# Altium PCB cando_pro_set.PcbDoc (part 1 of 3)
Units mm, origin at the board's own origin, x right, y up, seen from the top; angles counter-clockwise.
Board outline 91.6 x 86.4 mm, 2 copper layers (Top Layer, Bottom Layer); 320 components, 25 nets, 1260 pads, 588 vias.
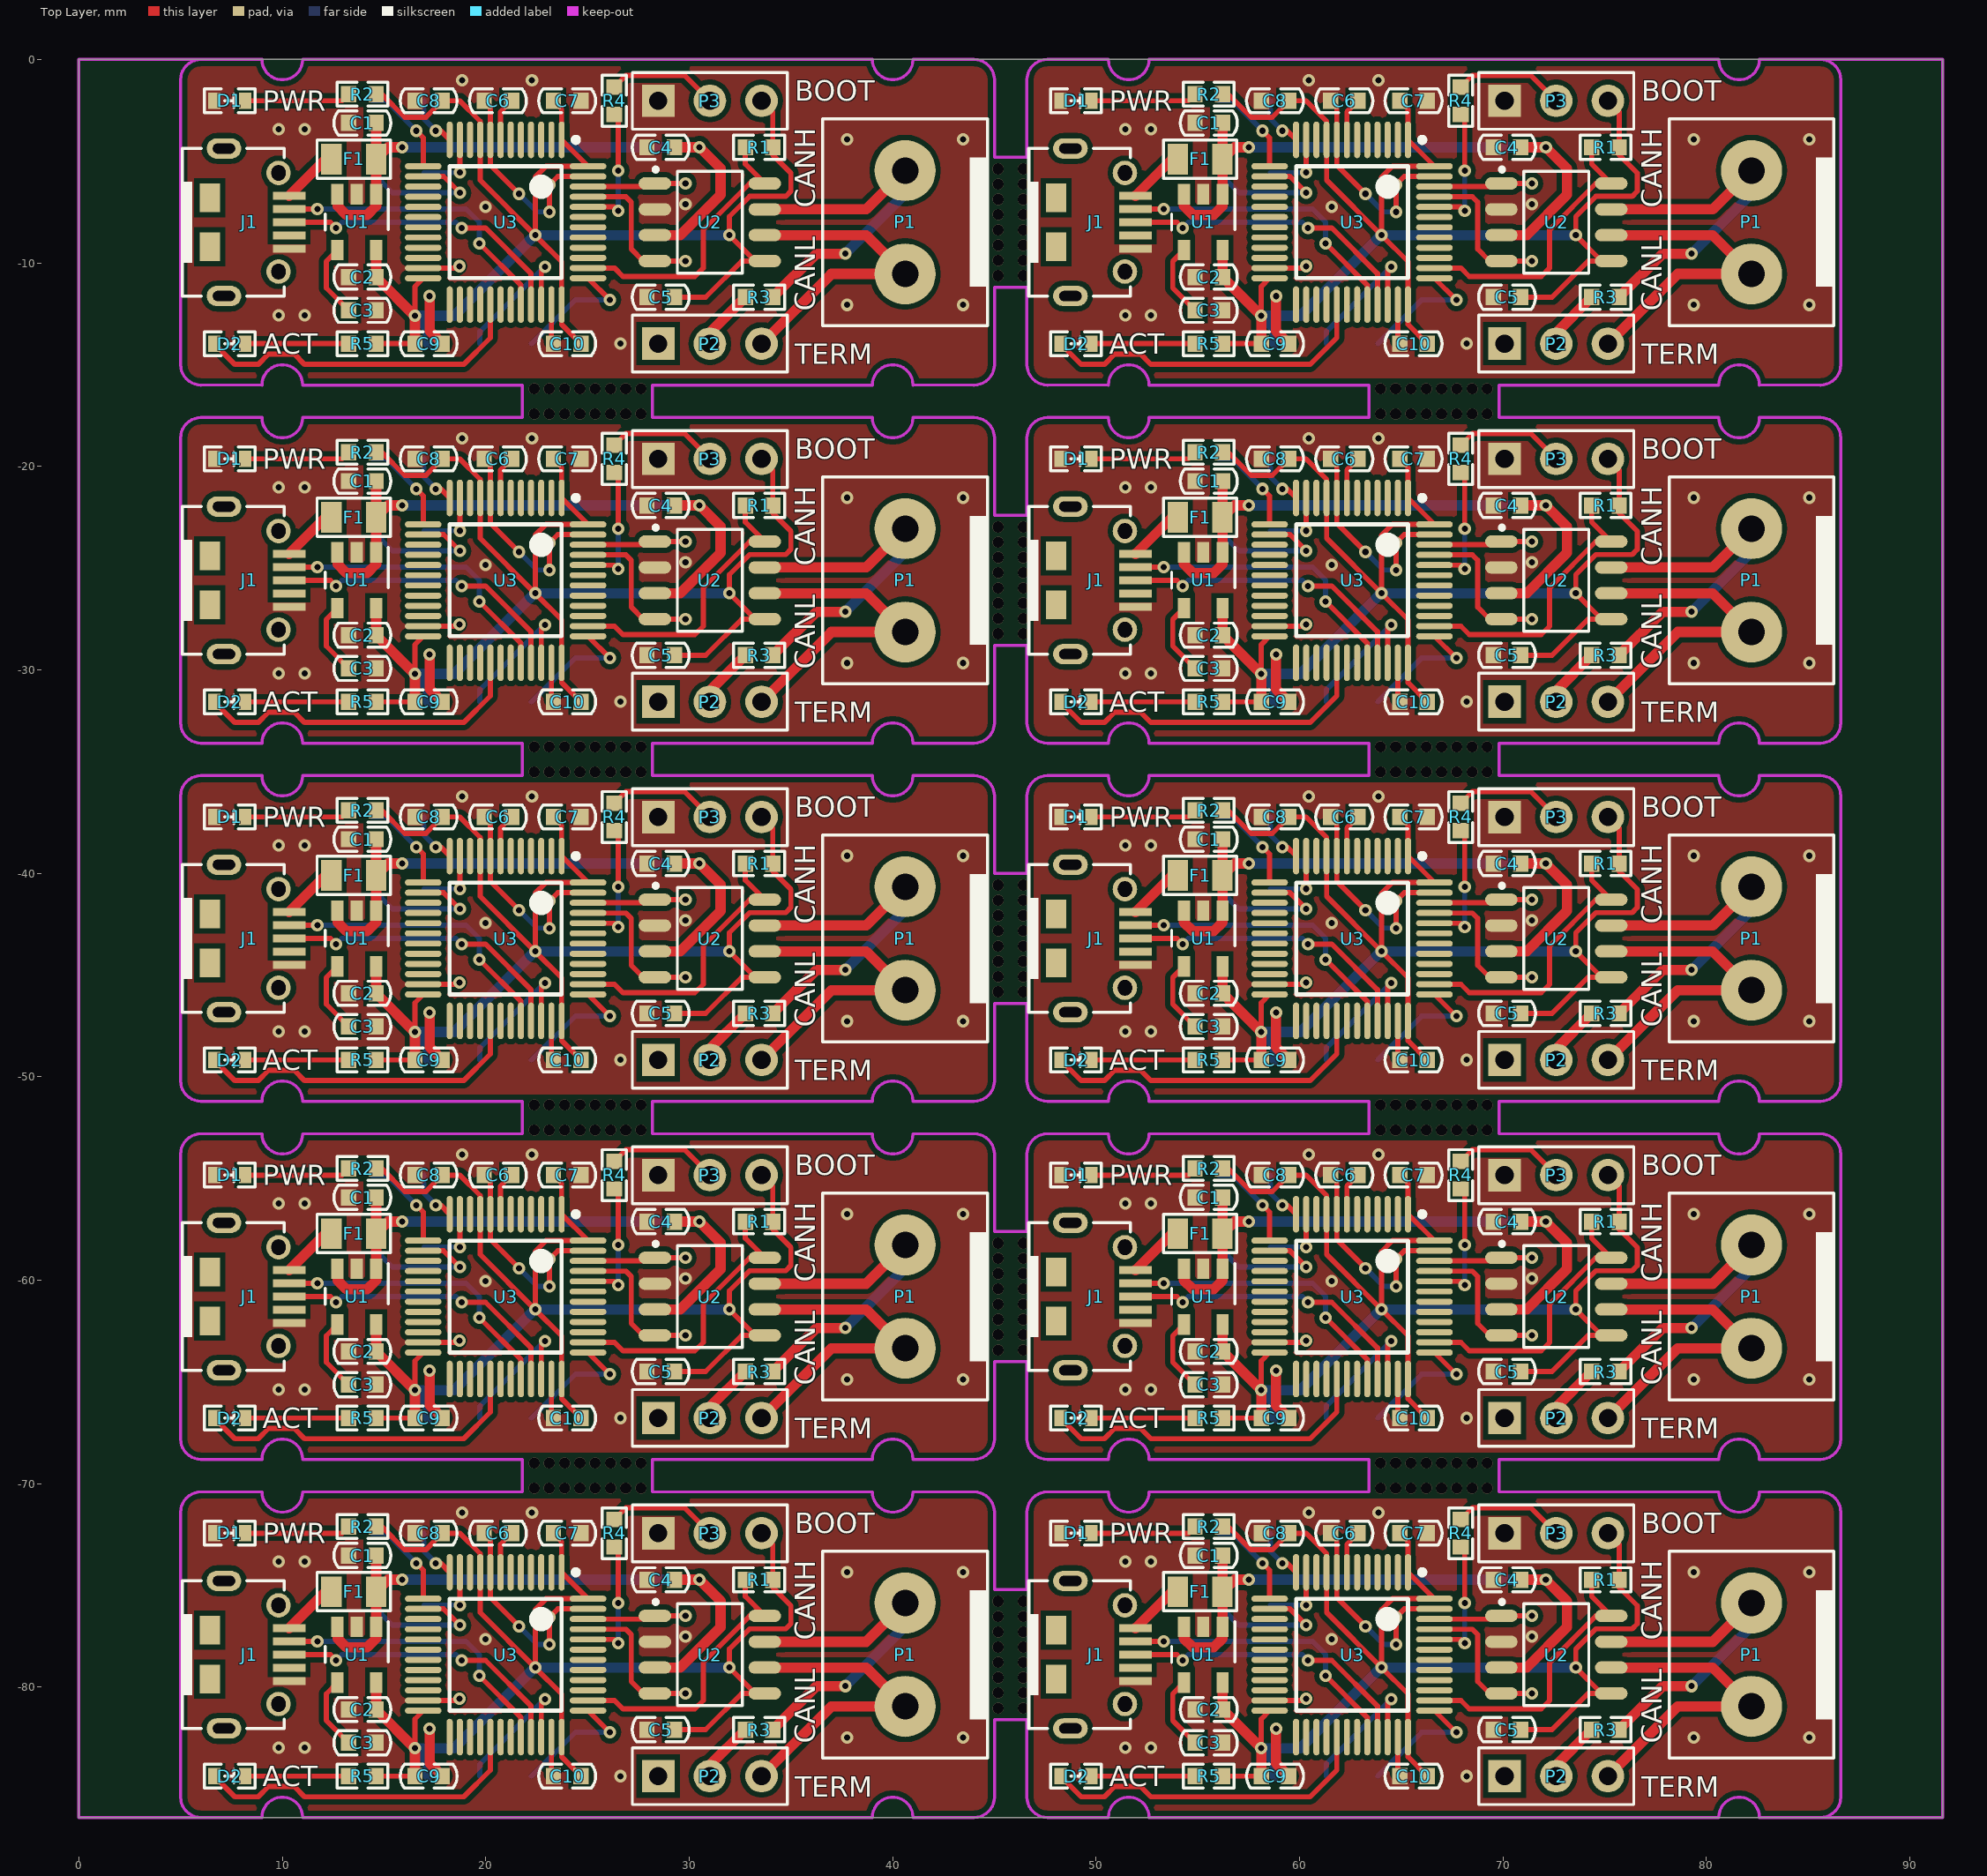
[diagram p0: Top Layer view]
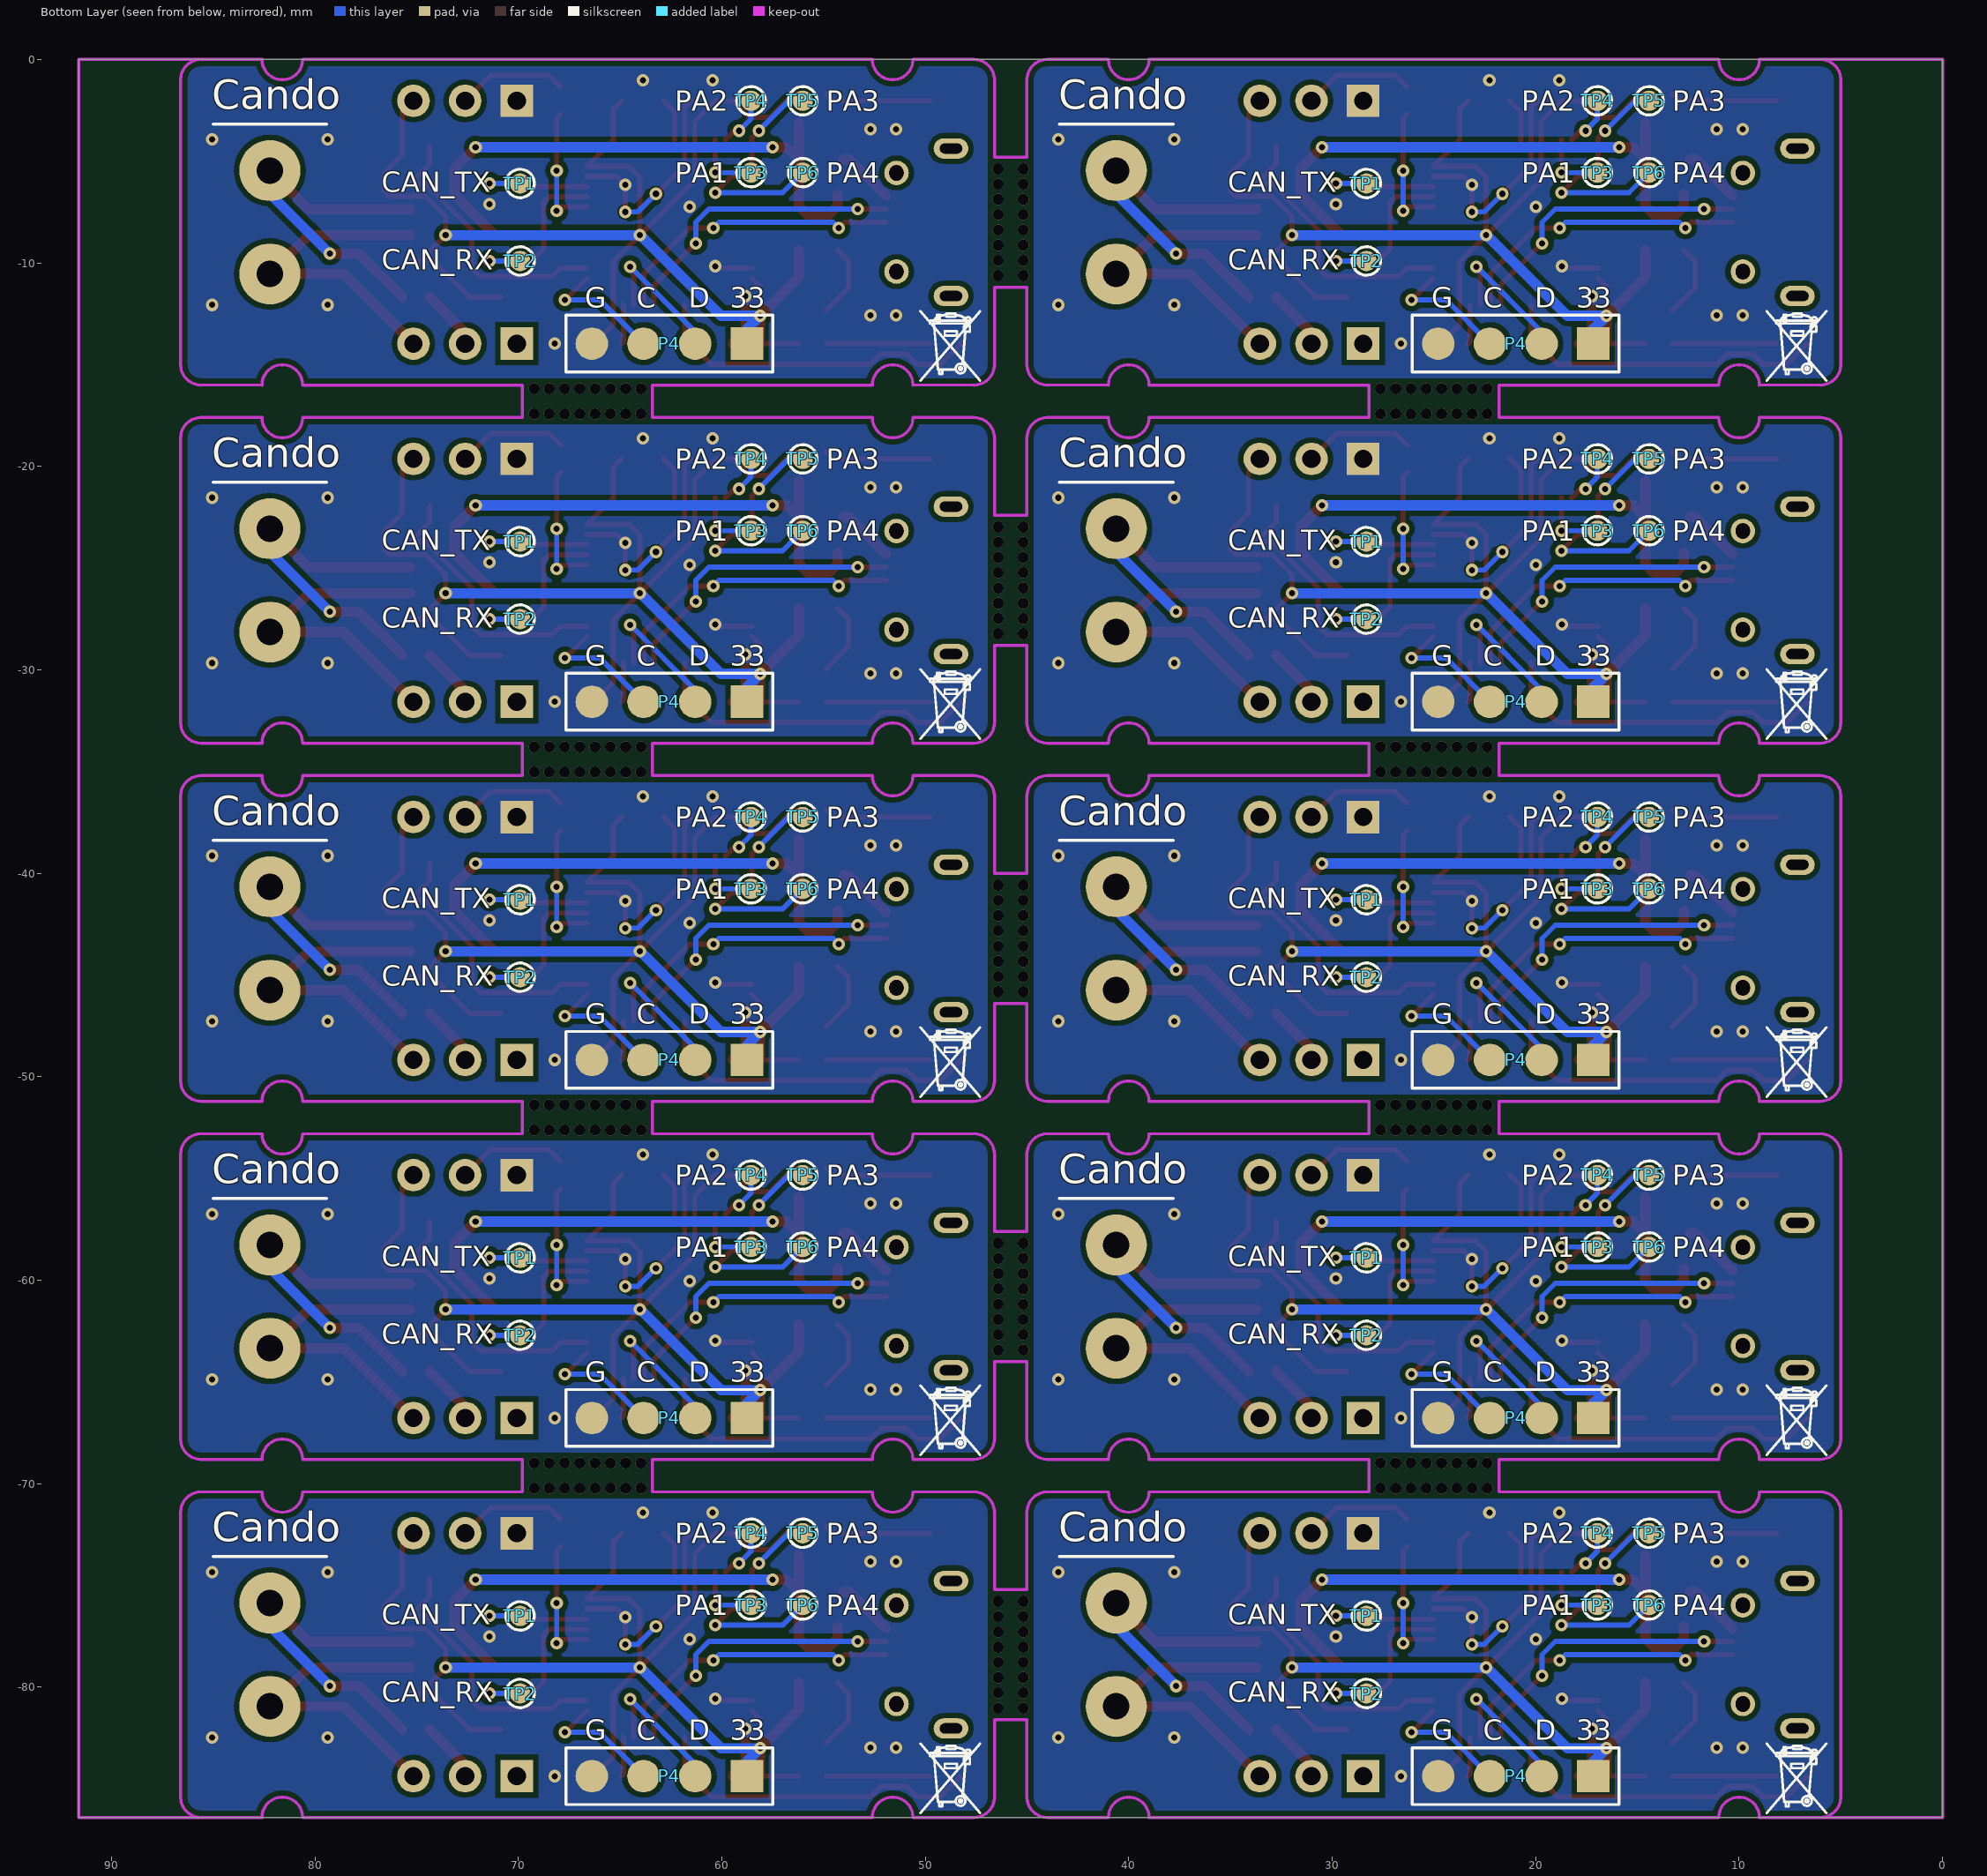
[diagram p1: Bottom Layer view, seen from below]

## Layer stack, top to bottom
Top Solder: solder mask 0.0102, Solder Resist, Dk 3.5
Top Layer: signal copper 0.0356
Dielectric 1: dielectric 0.32, FR-4, Dk 4.8
Bottom Layer: signal copper 0.0356
Bottom Solder: solder mask 0.0102, Solder Resist, Dk 3.5

## Board outline
0,-86.4 0,0 91.6,0 91.6,-86.4

## Design rules (kind name [scope] priority, off if disabled: settings)
Clearance [All] p1: gap=0.254
PolygonConnect [All] p1: connectstyle=Relief reliefconductorwidth=0.254 reliefentries=4 polygonreliefangle="90 Angle" airgapwidth=0.254
RoutingVias [All] p1: holewidth=0.711 width=1.27 viastyle="Through Hole" minholewidth=0.711 minwidth=1.27 maxholewidth=0.711 maxwidth=1.27
SolderMaskExpansion [All] p1: expansion=0.102
Width [All] p1: maxlimit=0.254 minlimit=0.254 preferedwidth=0.254
30 further rules are at their usual default settings.

## Components (designator, comment, footprint, x,y, rotation, side; value= is the part's Value field where it differs from the comment)
C1 "4.7uF" 0603C 13.936,-3.123 r180 top
C1 "4.7uF" 0603C 55.536,-3.123 r180 top
C1 "4.7uF" 0603C 13.936,-20.723 r180 top
C1 "4.7uF" 0603C 55.536,-20.723 r180 top
C1 "4.7uF" 0603C 13.936,-38.323 r180 top
C1 "4.7uF" 0603C 55.536,-38.323 r180 top
C1 "4.7uF" 0603C 13.936,-55.923 r180 top
C1 "4.7uF" 0603C 55.536,-55.923 r180 top
C1 "4.7uF" 0603C 13.936,-73.523 r180 top
C1 "4.7uF" 0603C 55.536,-73.523 r180 top
C2 "4.7uF" 0603C 13.936,-10.692 r180 top
C2 "4.7uF" 0603C 55.536,-10.692 r180 top
C2 "4.7uF" 0603C 13.936,-28.292 r180 top
C2 "4.7uF" 0603C 55.536,-28.292 r180 top
C2 "4.7uF" 0603C 13.936,-45.892 r180 top
C2 "4.7uF" 0603C 55.536,-45.892 r180 top
C2 "4.7uF" 0603C 13.936,-63.492 r180 top
C2 "4.7uF" 0603C 55.536,-63.492 r180 top
C2 "4.7uF" 0603C 13.936,-81.092 r180 top
C2 "4.7uF" 0603C 55.536,-81.092 r180 top
C3 "22nF" 0603C 13.936,-12.331 r0 top
C3 "22nF" 0603C 55.536,-12.331 r0 top
C3 "22nF" 0603C 13.936,-29.931 r0 top
C3 "22nF" 0603C 55.536,-29.931 r0 top
C3 "22nF" 0603C 13.936,-47.531 r0 top
C3 "22nF" 0603C 55.536,-47.531 r0 top
C3 "22nF" 0603C 13.936,-65.131 r0 top
C3 "22nF" 0603C 55.536,-65.131 r0 top
C3 "22nF" 0603C 13.936,-82.731 r0 top
C3 "22nF" 0603C 55.536,-82.731 r0 top
C4 "100nF" 0603C 28.597,-4.317 r180 top
C4 "100nF" 0603C 70.197,-4.317 r180 top
C4 "100nF" 0603C 28.597,-21.917 r180 top
C4 "100nF" 0603C 70.197,-21.917 r180 top
C4 "100nF" 0603C 28.597,-39.517 r180 top
C4 "100nF" 0603C 70.197,-39.517 r180 top
C4 "100nF" 0603C 28.597,-57.117 r180 top
C4 "100nF" 0603C 70.197,-57.117 r180 top
C4 "100nF" 0603C 28.597,-74.717 r180 top
C4 "100nF" 0603C 70.197,-74.717 r180 top
C5 "100nF" 0603C 28.597,-11.683 r180 top
C5 "100nF" 0603C 70.197,-11.683 r180 top
C5 "100nF" 0603C 28.597,-29.283 r180 top
C5 "100nF" 0603C 70.197,-29.283 r180 top
C5 "100nF" 0603C 28.597,-46.883 r180 top
C5 "100nF" 0603C 70.197,-46.883 r180 top
C5 "100nF" 0603C 28.597,-64.483 r180 top
C5 "100nF" 0603C 70.197,-64.483 r180 top
C5 "100nF" 0603C 28.597,-82.083 r180 top
C5 "100nF" 0603C 70.197,-82.083 r180 top
C6 "100nF" 0603C 20.596,-2.031 r180 top
C6 "100nF" 0603C 62.196,-2.031 r180 top
C6 "100nF" 0603C 20.596,-19.631 r180 top
C6 "100nF" 0603C 62.196,-19.631 r180 top
C6 "100nF" 0603C 20.596,-37.231 r180 top
C6 "100nF" 0603C 62.196,-37.231 r180 top
C6 "100nF" 0603C 20.596,-54.831 r180 top
C6 "100nF" 0603C 62.196,-54.831 r180 top
C6 "100nF" 0603C 20.596,-72.431 r180 top
C6 "100nF" 0603C 62.196,-72.431 r180 top
C7 "100nF" 0603C 24,-2.031 r0 top
C7 "100nF" 0603C 65.6,-2.031 r0 top
C7 "100nF" 0603C 24,-19.631 r0 top
C7 "100nF" 0603C 65.6,-19.631 r0 top
C7 "100nF" 0603C 24,-37.231 r0 top
C7 "100nF" 0603C 65.6,-37.231 r0 top
C7 "100nF" 0603C 24,-54.831 r0 top
C7 "100nF" 0603C 65.6,-54.831 r0 top
C7 "100nF" 0603C 24,-72.431 r0 top
C7 "100nF" 0603C 65.6,-72.431 r0 top
C8 "100nF" 0603C 17.192,-2.031 r180 top
C8 "100nF" 0603C 58.792,-2.031 r180 top
C8 "100nF" 0603C 17.192,-19.631 r180 top
C8 "100nF" 0603C 58.792,-19.631 r180 top
C8 "100nF" 0603C 17.192,-37.231 r180 top
C8 "100nF" 0603C 58.792,-37.231 r180 top
C8 "100nF" 0603C 17.192,-54.831 r180 top
C8 "100nF" 0603C 58.792,-54.831 r180 top
C8 "100nF" 0603C 17.192,-72.431 r180 top
C8 "100nF" 0603C 58.792,-72.431 r180 top
C9 "100nF" 0603C 17.192,-13.969 r0 top
C9 "100nF" 0603C 58.792,-13.969 r0 top
C9 "100nF" 0603C 17.192,-31.569 r0 top
C9 "100nF" 0603C 58.792,-31.569 r0 top
C9 "100nF" 0603C 17.192,-49.169 r0 top
C9 "100nF" 0603C 58.792,-49.169 r0 top
C9 "100nF" 0603C 17.192,-66.769 r0 top
C9 "100nF" 0603C 58.792,-66.769 r0 top
C9 "100nF" 0603C 17.192,-84.369 r0 top
C9 "100nF" 0603C 58.792,-84.369 r0 top
C10 "100nF" 0603C 24,-13.969 r180 top
C10 "100nF" 0603C 65.6,-13.969 r180 top
C10 "100nF" 0603C 24,-31.569 r180 top
C10 "100nF" 0603C 65.6,-31.569 r180 top
C10 "100nF" 0603C 24,-49.169 r180 top
C10 "100nF" 0603C 65.6,-49.169 r180 top
C10 "100nF" 0603C 24,-66.769 r180 top
C10 "100nF" 0603C 65.6,-66.769 r180 top
C10 "100nF" 0603C 24,-84.369 r180 top
C10 "100nF" 0603C 65.6,-84.369 r180 top
D1 "LED_GREEN" LED_0603_GREEN 7.413,-2.031 r180 top
D1 "LED_GREEN" LED_0603_GREEN 49.013,-2.031 r180 top
D1 "LED_GREEN" LED_0603_GREEN 7.413,-19.631 r180 top
D1 "LED_GREEN" LED_0603_GREEN 49.013,-19.631 r180 top
D1 "LED_GREEN" LED_0603_GREEN 7.413,-37.231 r180 top
D1 "LED_GREEN" LED_0603_GREEN 49.013,-37.231 r180 top
D1 "LED_GREEN" LED_0603_GREEN 7.413,-54.831 r180 top
D1 "LED_GREEN" LED_0603_GREEN 49.013,-54.831 r180 top
D1 "LED_GREEN" LED_0603_GREEN 7.413,-72.431 r180 top
D1 "LED_GREEN" LED_0603_GREEN 49.013,-72.431 r180 top
D2 "LED_BLUE" LED_0603_BLUE 7.413,-13.969 r180 top
D2 "LED_BLUE" LED_0603_BLUE 49.013,-13.969 r180 top
D2 "LED_BLUE" LED_0603_BLUE 7.413,-31.569 r180 top
D2 "LED_BLUE" LED_0603_BLUE 49.013,-31.569 r180 top
D2 "LED_BLUE" LED_0603_BLUE 7.413,-49.169 r180 top
D2 "LED_BLUE" LED_0603_BLUE 49.013,-49.169 r180 top
D2 "LED_BLUE" LED_0603_BLUE 7.413,-66.769 r180 top
D2 "LED_BLUE" LED_0603_BLUE 49.013,-66.769 r180 top
D2 "LED_BLUE" LED_0603_BLUE 7.413,-84.369 r180 top
D2 "LED_BLUE" LED_0603_BLUE 49.013,-84.369 r180 top
F1 "Fuse" FUSE_0805 13.511,-4.901 r0 top
F1 "Fuse" FUSE_0805 55.111,-4.901 r0 top
F1 "Fuse" FUSE_0805 13.511,-22.501 r0 top
F1 "Fuse" FUSE_0805 55.111,-22.501 r0 top
F1 "Fuse" FUSE_0805 13.511,-40.101 r0 top
F1 "Fuse" FUSE_0805 55.111,-40.101 r0 top
F1 "Fuse" FUSE_0805 13.511,-57.701 r0 top
F1 "Fuse" FUSE_0805 55.111,-57.701 r0 top
F1 "Fuse" FUSE_0805 13.511,-75.301 r0 top
F1 "Fuse" FUSE_0805 55.111,-75.301 r0 top
J1 "MicroUSB-B" USB-Micro_0 8.434,-8 r0 top
J1 "MicroUSB-B" USB-Micro_0 50.034,-8 r0 top
J1 "MicroUSB-B" USB-Micro_0 8.434,-25.6 r0 top
J1 "MicroUSB-B" USB-Micro_0 50.034,-25.6 r0 top
J1 "MicroUSB-B" USB-Micro_0 8.434,-43.2 r0 top
J1 "MicroUSB-B" USB-Micro_0 50.034,-43.2 r0 top
J1 "MicroUSB-B" USB-Micro_0 8.434,-60.8 r0 top
J1 "MicroUSB-B" USB-Micro_0 50.034,-60.8 r0 top
J1 "MicroUSB-B" USB-Micro_0 8.434,-78.4 r0 top
J1 "MicroUSB-B" USB-Micro_0 50.034,-78.4 r0 top
P1 "MKDSN1.5_2-5.08" MKDSN-5.08-3P 40.611,-8 r0 top
P1 "MKDSN1.5_2-5.08" MKDSN-5.08-3P 82.211,-8 r0 top
P1 "MKDSN1.5_2-5.08" MKDSN-5.08-3P 40.611,-25.6 r0 top
P1 "MKDSN1.5_2-5.08" MKDSN-5.08-3P 82.211,-25.6 r0 top
P1 "MKDSN1.5_2-5.08" MKDSN-5.08-3P 40.611,-43.2 r0 top
P1 "MKDSN1.5_2-5.08" MKDSN-5.08-3P 82.211,-43.2 r0 top
P1 "MKDSN1.5_2-5.08" MKDSN-5.08-3P 40.611,-60.8 r0 top
P1 "MKDSN1.5_2-5.08" MKDSN-5.08-3P 82.211,-60.8 r0 top
P1 "MKDSN1.5_2-5.08" MKDSN-5.08-3P 40.611,-78.4 r0 top
P1 "MKDSN1.5_2-5.08" MKDSN-5.08-3P 82.211,-78.4 r0 top
P2 "Header_3_2.54" HEADER_3 31.015,-13.969 r90 top
P2 "Header_3_2.54" HEADER_3 72.615,-13.969 r90 top
P2 "Header_3_2.54" HEADER_3 31.015,-31.569 r90 top
P2 "Header_3_2.54" HEADER_3 72.615,-31.569 r90 top
P2 "Header_3_2.54" HEADER_3 31.015,-49.169 r90 top
P2 "Header_3_2.54" HEADER_3 72.615,-49.169 r90 top
P2 "Header_3_2.54" HEADER_3 31.015,-66.769 r90 top
P2 "Header_3_2.54" HEADER_3 72.615,-66.769 r90 top
P2 "Header_3_2.54" HEADER_3 31.015,-84.369 r90 top
P2 "Header_3_2.54" HEADER_3 72.615,-84.369 r90 top
P3 "Header_3_2.54" HEADER_3 31.015,-2.031 r90 top
P3 "Header_3_2.54" HEADER_3 72.615,-2.031 r90 top
P3 "Header_3_2.54" HEADER_3 31.015,-19.631 r90 top
P3 "Header_3_2.54" HEADER_3 72.615,-19.631 r90 top
P3 "Header_3_2.54" HEADER_3 31.015,-37.231 r90 top
P3 "Header_3_2.54" HEADER_3 72.615,-37.231 r90 top
P3 "Header_3_2.54" HEADER_3 31.015,-54.831 r90 top
P3 "Header_3_2.54" HEADER_3 72.615,-54.831 r90 top
P3 "Header_3_2.54" HEADER_3 31.015,-72.431 r90 top
P3 "Header_3_2.54" HEADER_3 72.615,-72.431 r90 top
P4 "PAD_4_2.54" HEADER_4_PAD 20.977,-13.969 r270 bottom
P4 "PAD_4_2.54" HEADER_4_PAD 62.577,-13.969 r270 bottom
P4 "PAD_4_2.54" HEADER_4_PAD 20.977,-31.569 r270 bottom
P4 "PAD_4_2.54" HEADER_4_PAD 62.577,-31.569 r270 bottom
P4 "PAD_4_2.54" HEADER_4_PAD 20.977,-49.169 r270 bottom
P4 "PAD_4_2.54" HEADER_4_PAD 62.577,-49.169 r270 bottom
P4 "PAD_4_2.54" HEADER_4_PAD 20.977,-66.769 r270 bottom
P4 "PAD_4_2.54" HEADER_4_PAD 62.577,-66.769 r270 bottom
P4 "PAD_4_2.54" HEADER_4_PAD 20.977,-84.369 r270 bottom
P4 "PAD_4_2.54" HEADER_4_PAD 62.577,-84.369 r270 bottom
R1 "10K" 0603R 33.433,-4.317 r0 top
R1 "10K" 0603R 75.033,-4.317 r0 top
R1 "10K" 0603R 33.433,-21.917 r0 top
R1 "10K" 0603R 75.033,-21.917 r0 top
R1 "10K" 0603R 33.433,-39.517 r0 top
R1 "10K" 0603R 75.033,-39.517 r0 top
R1 "10K" 0603R 33.433,-57.117 r0 top
R1 "10K" 0603R 75.033,-57.117 r0 top
R1 "10K" 0603R 33.433,-74.717 r0 top
R1 "10K" 0603R 75.033,-74.717 r0 top
R2 "10K" 0603R 13.936,-1.701 r180 top
R2 "10K" 0603R 55.536,-1.701 r180 top
R2 "10K" 0603R 13.936,-19.301 r180 top
R2 "10K" 0603R 55.536,-19.301 r180 top
R2 "10K" 0603R 13.936,-36.901 r180 top
R2 "10K" 0603R 55.536,-36.901 r180 top
R2 "10K" 0603R 13.936,-54.501 r180 top
R2 "10K" 0603R 55.536,-54.501 r180 top
R2 "10K" 0603R 13.936,-72.101 r180 top
R2 "10K" 0603R 55.536,-72.101 r180 top
R3 "120R" 0603R 33.433,-11.683 r180 top
R3 "120R" 0603R 75.033,-11.683 r180 top
R3 "120R" 0603R 33.433,-29.283 r180 top
R3 "120R" 0603R 75.033,-29.283 r180 top
R3 "120R" 0603R 33.433,-46.883 r180 top
R3 "120R" 0603R 75.033,-46.883 r180 top
R3 "120R" 0603R 33.433,-64.483 r180 top
R3 "120R" 0603R 75.033,-64.483 r180 top
R3 "120R" 0603R 33.433,-82.083 r180 top
R3 "120R" 0603R 75.033,-82.083 r180 top
R4 "10K" 0603R 26.316,-2.031 r90 top
R4 "10K" 0603R 67.916,-2.031 r90 top
R4 "10K" 0603R 26.316,-19.631 r90 top
R4 "10K" 0603R 67.916,-19.631 r90 top
R4 "10K" 0603R 26.316,-37.231 r90 top
R4 "10K" 0603R 67.916,-37.231 r90 top
R4 "10K" 0603R 26.316,-54.831 r90 top
R4 "10K" 0603R 67.916,-54.831 r90 top
R4 "10K" 0603R 26.316,-72.431 r90 top
R4 "10K" 0603R 67.916,-72.431 r90 top
R5 "10K" 0603R 13.936,-13.969 r180 top
R5 "10K" 0603R 55.536,-13.969 r180 top
R5 "10K" 0603R 13.936,-31.569 r180 top
R5 "10K" 0603R 55.536,-31.569 r180 top
R5 "10K" 0603R 13.936,-49.169 r180 top
R5 "10K" 0603R 55.536,-49.169 r180 top
R5 "10K" 0603R 13.936,-66.769 r180 top
R5 "10K" 0603R 55.536,-66.769 r180 top
R5 "10K" 0603R 13.936,-84.369 r180 top
R5 "10K" 0603R 55.536,-84.369 r180 top
TP1 "Ø1.5mm,SMD" TP_SMD 28.315,-6.095 r180 bottom
TP1 "Ø1.5mm,SMD" TP_SMD 69.915,-6.095 r180 bottom
TP1 "Ø1.5mm,SMD" TP_SMD 28.315,-23.695 r180 bottom
TP1 "Ø1.5mm,SMD" TP_SMD 69.915,-23.695 r180 bottom
TP1 "Ø1.5mm,SMD" TP_SMD 28.315,-41.295 r180 bottom
TP1 "Ø1.5mm,SMD" TP_SMD 69.915,-41.295 r180 bottom
TP1 "Ø1.5mm,SMD" TP_SMD 28.315,-58.895 r180 bottom
TP1 "Ø1.5mm,SMD" TP_SMD 69.915,-58.895 r180 bottom
TP1 "Ø1.5mm,SMD" TP_SMD 28.315,-76.495 r180 bottom
TP1 "Ø1.5mm,SMD" TP_SMD 69.915,-76.495 r180 bottom
TP2 "Ø1.5mm,SMD" TP_SMD 28.315,-9.905 r90 bottom
TP2 "Ø1.5mm,SMD" TP_SMD 69.915,-9.905 r90 bottom
TP2 "Ø1.5mm,SMD" TP_SMD 28.315,-27.505 r90 bottom
TP2 "Ø1.5mm,SMD" TP_SMD 69.915,-27.505 r90 bottom
TP2 "Ø1.5mm,SMD" TP_SMD 28.315,-45.105 r90 bottom
TP2 "Ø1.5mm,SMD" TP_SMD 69.915,-45.105 r90 bottom
TP2 "Ø1.5mm,SMD" TP_SMD 28.315,-62.705 r90 bottom
TP2 "Ø1.5mm,SMD" TP_SMD 69.915,-62.705 r90 bottom
TP2 "Ø1.5mm,SMD" TP_SMD 28.315,-80.305 r90 bottom
TP2 "Ø1.5mm,SMD" TP_SMD 69.915,-80.305 r90 bottom
TP3 "Ø1.5mm,SMD" TP_SMD 16.963,-5.562 r270 bottom
TP3 "Ø1.5mm,SMD" TP_SMD 58.563,-5.562 r270 bottom
TP3 "Ø1.5mm,SMD" TP_SMD 16.963,-23.162 r270 bottom
TP3 "Ø1.5mm,SMD" TP_SMD 58.563,-23.162 r270 bottom
TP3 "Ø1.5mm,SMD" TP_SMD 16.963,-40.762 r270 bottom
TP3 "Ø1.5mm,SMD" TP_SMD 58.563,-40.762 r270 bottom
TP3 "Ø1.5mm,SMD" TP_SMD 16.963,-58.362 r270 bottom
TP3 "Ø1.5mm,SMD" TP_SMD 58.563,-58.362 r270 bottom
TP3 "Ø1.5mm,SMD" TP_SMD 16.963,-75.962 r270 bottom
TP3 "Ø1.5mm,SMD" TP_SMD 58.563,-75.962 r270 bottom
TP4 "Ø1.5mm,SMD" TP_SMD 16.963,-2.031 r270 bottom
TP4 "Ø1.5mm,SMD" TP_SMD 58.563,-2.031 r270 bottom
TP4 "Ø1.5mm,SMD" TP_SMD 16.963,-19.631 r270 bottom
TP4 "Ø1.5mm,SMD" TP_SMD 58.563,-19.631 r270 bottom
TP4 "Ø1.5mm,SMD" TP_SMD 16.963,-37.231 r270 bottom
TP4 "Ø1.5mm,SMD" TP_SMD 58.563,-37.231 r270 bottom
TP4 "Ø1.5mm,SMD" TP_SMD 16.963,-54.831 r270 bottom
TP4 "Ø1.5mm,SMD" TP_SMD 58.563,-54.831 r270 bottom
TP4 "Ø1.5mm,SMD" TP_SMD 16.963,-72.431 r270 bottom
TP4 "Ø1.5mm,SMD" TP_SMD 58.563,-72.431 r270 bottom
TP5 "Ø1.5mm,SMD" TP_SMD 14.423,-2.031 r270 bottom
TP5 "Ø1.5mm,SMD" TP_SMD 56.023,-2.031 r270 bottom
TP5 "Ø1.5mm,SMD" TP_SMD 14.423,-19.631 r270 bottom
TP5 "Ø1.5mm,SMD" TP_SMD 56.023,-19.631 r270 bottom
TP5 "Ø1.5mm,SMD" TP_SMD 14.423,-37.231 r270 bottom
TP5 "Ø1.5mm,SMD" TP_SMD 56.023,-37.231 r270 bottom
TP5 "Ø1.5mm,SMD" TP_SMD 14.423,-54.831 r270 bottom
TP5 "Ø1.5mm,SMD" TP_SMD 56.023,-54.831 r270 bottom
TP5 "Ø1.5mm,SMD" TP_SMD 14.423,-72.431 r270 bottom
TP5 "Ø1.5mm,SMD" TP_SMD 56.023,-72.431 r270 bottom
TP6 "Ø1.5mm,SMD" TP_SMD 14.423,-5.562 r270 bottom
TP6 "Ø1.5mm,SMD" TP_SMD 56.023,-5.562 r270 bottom
TP6 "Ø1.5mm,SMD" TP_SMD 14.423,-23.162 r270 bottom
TP6 "Ø1.5mm,SMD" TP_SMD 56.023,-23.162 r270 bottom
TP6 "Ø1.5mm,SMD" TP_SMD 14.423,-40.762 r270 bottom
TP6 "Ø1.5mm,SMD" TP_SMD 56.023,-40.762 r270 bottom
TP6 "Ø1.5mm,SMD" TP_SMD 14.423,-58.362 r270 bottom
TP6 "Ø1.5mm,SMD" TP_SMD 56.023,-58.362 r270 bottom
TP6 "Ø1.5mm,SMD" TP_SMD 14.423,-75.962 r270 bottom
TP6 "Ø1.5mm,SMD" TP_SMD 56.023,-75.962 r270 bottom
U1 "RT9193-33GB" SOT23-5 13.661,-8 r270 top
U1 "RT9193-33GB" SOT23-5 55.261,-8 r270 top
U1 "RT9193-33GB" SOT23-5 13.661,-25.6 r270 top
U1 "RT9193-33GB" SOT23-5 55.261,-25.6 r270 top
U1 "RT9193-33GB" SOT23-5 13.661,-43.2 r270 top
U1 "RT9193-33GB" SOT23-5 55.261,-43.2 r270 top
U1 "RT9193-33GB" SOT23-5 13.661,-60.8 r270 top
U1 "RT9193-33GB" SOT23-5 55.261,-60.8 r270 top
U1 "RT9193-33GB" SOT23-5 13.661,-78.4 r270 top
U1 "RT9193-33GB" SOT23-5 55.261,-78.4 r270 top
U2 "TJA1051T/3" SOIC8 31.015,-8 r0 top
U2 "TJA1051T/3" SOIC8 72.615,-8 r0 top
U2 "TJA1051T/3" SOIC8 31.015,-25.6 r0 top
U2 "TJA1051T/3" SOIC8 72.615,-25.6 r0 top
U2 "TJA1051T/3" SOIC8 31.015,-43.2 r0 top
U2 "TJA1051T/3" SOIC8 72.615,-43.2 r0 top
U2 "TJA1051T/3" SOIC8 31.015,-60.8 r0 top
U2 "TJA1051T/3" SOIC8 72.615,-60.8 r0 top
U2 "TJA1051T/3" SOIC8 31.015,-78.4 r0 top
U2 "TJA1051T/3" SOIC8 72.615,-78.4 r0 top
U3 "STM32F072C8T6" STM-LQFP48_N 20.977,-8 r270 top
U3 "STM32F072C8T6" STM-LQFP48_N 62.577,-8 r270 top
U3 "STM32F072C8T6" STM-LQFP48_N 20.977,-25.6 r270 top
U3 "STM32F072C8T6" STM-LQFP48_N 62.577,-25.6 r270 top
U3 "STM32F072C8T6" STM-LQFP48_N 20.977,-43.2 r270 top
U3 "STM32F072C8T6" STM-LQFP48_N 62.577,-43.2 r270 top
U3 "STM32F072C8T6" STM-LQFP48_N 20.977,-60.8 r270 top
U3 "STM32F072C8T6" STM-LQFP48_N 62.577,-60.8 r270 top
U3 "STM32F072C8T6" STM-LQFP48_N 20.977,-78.4 r270 top
U3 "STM32F072C8T6" STM-LQFP48_N 62.577,-78.4 r270 top

## Footprints (in the part's own frame and the unit in brackets; to place one, negate y for a bottom-side part, rotate by r counter-clockwise, add the part's x,y. Pads: shape width x height; smd on the part's side, far side on the other; paste and mask are expansions set on the pad)
0603C [mm]
  rect 0.75x0.8 smd: 1(-0.675,0) 2(0.675,0)
  silkscreen extent -1.4,-0.59 1.4,0.59, body extent -0.8,-0.43 0.8,0.43, height 0.8
0603R [mm]
  rect 0.75x0.8 smd: 1(-0.675,0) 2(0.675,0)
  silkscreen extent -1.25,-0.59 1.25,0.59, body extent -0.8,-0.41 0.8,0.4, height 0.41
FUSE_0805 [mm]
  rect 1x1.5 smd: 1(-1.1,0) 2(1.1,0)
  silkscreen extent -1.8,-0.94 1.8,0.94, body extent -1.05,-0.65 1.1,0.7, height 0.66
HEADER_3 [mm]
  rect 1.6x1.6 hole 0.9: 1(0,2.54)
  round 1.6 hole 0.9: 2(0,0) 3(0,-2.54)
  silkscreen extent -1.4,-3.81 1.4,3.81, body extent -1.27,-3.81 1.27,3.81, height 8
HEADER_4_PAD [mm]
  rect 1.6x1.6 smd: 1(0,3.81)
  round 1.6 smd: 2(0,1.27) 3(0,-1.27) 4(0,-3.81)
  silkscreen extent -1.4,-5.08 1.4,5.08
LED_0603_BLUE [mm]
  rect 0.6x0.8 smd: 1(-0.76,0) 2(0.76,0)
  silkscreen extent -1.25,-0.59 1.25,0.59, body extent -0.8,-0.4 0.8,0.4, height 0.6
LED_0603_GREEN [mm]
  rect 0.6x0.8 smd: 1(-0.76,0) 2(0.76,0)
  silkscreen extent -1.25,-0.59 1.25,0.59, body extent -0.8,-0.4 0.8,0.4, height 0.6
MKDSN-5.08-3P [mm]
  round 3 hole 1.3: 1(0,2.54) 2(0,-2.54)
  silkscreen extent -4.05,-5.08 4.06,5.08, body extent -4.05,-5.66 4.05,5.07, height 10
SOIC8 [mm]
  oval 1.6x0.61 smd: 1(-2.7,1.905) 2(-2.7,0.635) 3(-2.7,-0.635) 4(-2.7,-1.905) 5(2.7,-1.905) 6(2.7,-0.635) 7(2.7,0.635) 8(2.7,1.905)
  silkscreen extent -2.77,-2.5 1.6,2.69, body extent -3,-2.45 3,2.45, height 1.7
SOT23-5 [mm]
  rect 1x0.6 smd paste+0 mask+0.051: 1(-1.375,0.95) 2(-1.375,0) 3(-1.375,-0.95) 4(1.375,-0.95) 5(1.375,0.95)
  silkscreen extent -1.63,-1.55 0.38,1.55, body extent -1.23,-1.5 1.27,1.5, height 1.05
STM-LQFP48_N [mm] "QFP, 48-Leads, Body 7x7mm, Pitch 0.5mm, IPC Medium Density"
  oval 1.8x0.3 smd: 1(-4.05,2.75) 2(-4.05,2.25) 3(-4.05,1.75) 4(-4.05,1.25) 5(-4.05,0.75) 6(-4.05,0.25) 7(-4.05,-0.25) 8(-4.05,-0.75) 9(-4.05,-1.25) 10(-4.05,-1.75) 11(-4.05,-2.25) 12(-4.05,-2.75) 25(4.05,-2.75) 26(4.05,-2.25) 27(4.05,-1.75) 28(4.05,-1.25) 29(4.05,-0.75) 30(4.05,-0.25) 31(4.05,0.25) 32(4.05,0.75) 33(4.05,1.25) 34(4.05,1.75) 35(4.05,2.25) 36(4.05,2.75)
  oval 0.3x1.8 smd: 13(-2.75,-4.05) 14(-2.25,-4.05) 15(-1.75,-4.05) 16(-1.25,-4.05) 17(-0.75,-4.05) 18(-0.25,-4.05) 19(0.25,-4.05) 20(0.75,-4.05) 21(1.25,-4.05) 22(1.75,-4.05) 23(2.25,-4.05) 24(2.75,-4.05) 37(2.75,4.05) 38(2.25,4.05) 39(1.75,4.05) 40(1.25,4.05) 41(0.75,4.05) 42(0.25,4.05) 43(-0.25,4.05) 44(-0.75,4.05) 45(-1.25,4.05) 46(-1.75,4.05) 47(-2.25,4.05) 48(-2.75,4.05)
  silkscreen extent -4.17,-2.75 2.75,3.58, body extent -4.5,-4.5 4.5,4.5, height 1.6
TP_SMD [mm]
  round 1 smd paste-5: 1(0,0)
  silkscreen extent -0.7,-0.7 0.7,0.7
USB-Micro_0 [mm]
  rect 1.6x0.4 smd: 1(1.9,1.3) 2(1.9,0.65) 3(1.9,0) 4(1.9,-0.65) 5(1.9,-1.3)
  rect 1x1.4 smd: 6(-2,-1.2) 6(-2,1.2)
  oval 1.7x1 hole 0.5 slot 1.1 at 0 deg: 6(-1.3,-3.625) 6(-1.3,3.625)
  round 1.2 hole 0.7 slot 0.762 at 90 deg: 6(1.38,-2.425) 6(1.38,2.425)
  silkscreen extent -3.37,-3.62 1.66,3.63, body extent -3.86,-4.1 1.57,4.1, height 2.72

## Part data
C1 C1 C1 C1 C1 C1 C1 C1 C1 C1 C2 C2 C2 C2 C2 C2 C2 C2 C2 C2 C3 C3 C3 C3 C3 C3 C3 C3 C3 C3 C4 C4 C4 C4 C4 C4 C4 C4 C4 C4 C5 C5 C5 C5 C5 C5 C5 C5 C5 C5 C6 C6 C6 C6 C6 C6 C6 C6 C6 C6 C7 C7 C7 C7 C7 C7 C7 C7 C7 C7 C8 C8 C8 C8 C8 C8 C8 C8 C8 C8 C9 C9 C9 C9 C9 C9 C9 C9 C9 C9 C10 C10 C10 C10 C10 C10 C10 C10 C10 C10: "Capacitor"
D1 D1 D1 D1 D1 D1 D1 D1 D1 D1 D2 D2 D2 D2 D2 D2 D2 D2 D2 D2: library part LED, "LED"
J1 J1 J1 J1 J1 J1 J1 J1 J1 J1: "MicroUSB-B-SMT"
P1 P1 P1 P1 P1 P1 P1 P1 P1 P1: library part Header_2, "Header_2_2.54"
P2 P2 P2 P2 P2 P2 P2 P2 P2 P2 P3 P3 P3 P3 P3 P3 P3 P3 P3 P3: library part Header_3
P4 P4 P4 P4 P4 P4 P4 P4 P4 P4: library part Header_4, "Header_4_2.54"
R1 R1 R1 R1 R1 R1 R1 R1 R1 R1 R2 R2 R2 R2 R2 R2 R2 R2 R2 R2 R3 R3 R3 R3 R3 R3 R3 R3 R3 R3 R4 R4 R4 R4 R4 R4 R4 R4 R4 R4 R5 R5 R5 R5 R5 R5 R5 R5 R5 R5: "Resistor"
TP1 TP1 TP1 TP1 TP1 TP1 TP1 TP1 TP1 TP1 TP2 TP2 TP2 TP2 TP2 TP2 TP2 TP2 TP2 TP2 TP3 TP3 TP3 TP3 TP3 TP3 TP3 TP3 TP3 TP3 TP4 TP4 TP4 TP4 TP4 TP4 TP4 TP4 TP4 TP4 TP5 TP5 TP5 TP5 TP5 TP5 TP5 TP5 TP5 TP5 TP6 TP6 TP6 TP6 TP6 TP6 TP6 TP6 TP6 TP6: "1.0mm circular SMD testpad"
U1 U1 U1 U1 U1 U1 U1 U1 U1 U1: "Chip, RT9193-33GB, LDO Regulator"
U2 U2 U2 U2 U2 U2 U2 U2 U2 U2: "Chip, TJA1051T/3, CAN chip"
U3 U3 U3 U3 U3 U3 U3 U3 U3 U3: "ARM Cortex-M0 32-bit MCU, 64 KB Flash, 8 KB Internal RAM, 39 I/Os, 48-pin LQFP, -40 to 85 degC, Tray"

## Via types
v1: diameter 0.61, hole 0.305, Top Layer to Bottom Layer, tented both sides, 380 vias
v2: diameter 0.55, hole 0.55, Top Layer to Bottom Layer, 208 vias

## Nets (pads, with @x,y where several pads share a name; then routed paths per layer and width w, separated by ;. In a path a pad name is that pad's centre, name@x,y a point inside that pad or via, vN(x,y) a via of type N, cw(c..) or ccw(c..) an arc to the next point about the centre after c; other vN are vias at no path point)
BOOT0: 
CAN_RX: 
CAN_SILENT: 
CAN_TX: 
GND: 
LED_ACT: 
NetC3_1: 
NetC6_1: 
NetD1_1: 
NetD2_1: 
NetF1_1: 
NetP1_1: 
NetP1_2: 
NetP2_2: 
NetP3_2: 
NetTP3_1: 
NetTP4_1: 
NetTP5_1: 
NetTP6_1: 
SWCLK: 
SWDIO: 
USB_DM: 
USB_DP: 
V3.3: 
VCC: 
pads on no net: C1.1 C1.2 C2.1 C2.2 C3.1 C3.2 C4.1 C4.2 C5.1 C5.2 C6.1 C6.2 C7.1 C7.2 C8.1 C8.2 C9.1 C9.2 C10.1 C10.2 D1.1 D1.2 D2.1 D2.2 F1.1 F1.2 J1.1 J1.2 J1.3 J1.4 J1.5 J1.6 P1.1 P1.2 P2.1 P2.2 P2.3 P3.1 P3.2 P3.3 P4.1 P4.2 P4.3 P4.4 R1.1 R1.2 R2.1 R2.2 R3.1 R3.2 R4.1 R4.2 R5.1 R5.2 TP1.1 TP2.1 TP3.1 TP4.1 TP5.1 TP6.1 U1.1 U1.2 U1.3 U1.4 U1.5 U2.1 U2.2 U2.3 U2.4 U2.5 U2.6 U2.7 U2.8 U3.1 U3.2 U3.3 U3.4 U3.5 U3.6 U3.7 U3.8 U3.9 U3.10 U3.11 U3.12 U3.13 U3.14 U3.15 U3.16 U3.17 U3.18 U3.19 U3.20 U3.21 U3.22 U3.23 U3.24 U3.25 U3.26 U3.27 U3.28 U3.29 U3.30 U3.31 U3.32 U3.33 U3.34 U3.35 U3.36 U3.37 U3.38 U3.39 U3.40 U3.41 U3.42 U3.43 U3.44 U3.45 U3.46 U3.47 U3.48